# Altium PCB Line folowing robot za profesora.PcbDoc
Units mil, origin at the board's own origin, x right, y up, seen from the top; angles counter-clockwise.
Board outline 3040 x 2340 mil, 2 copper layers (Top Layer, Bottom Layer); 33 components, 29 nets, 122 pads, 41 vias.
Unrouted connection lines stored in the file: 12.
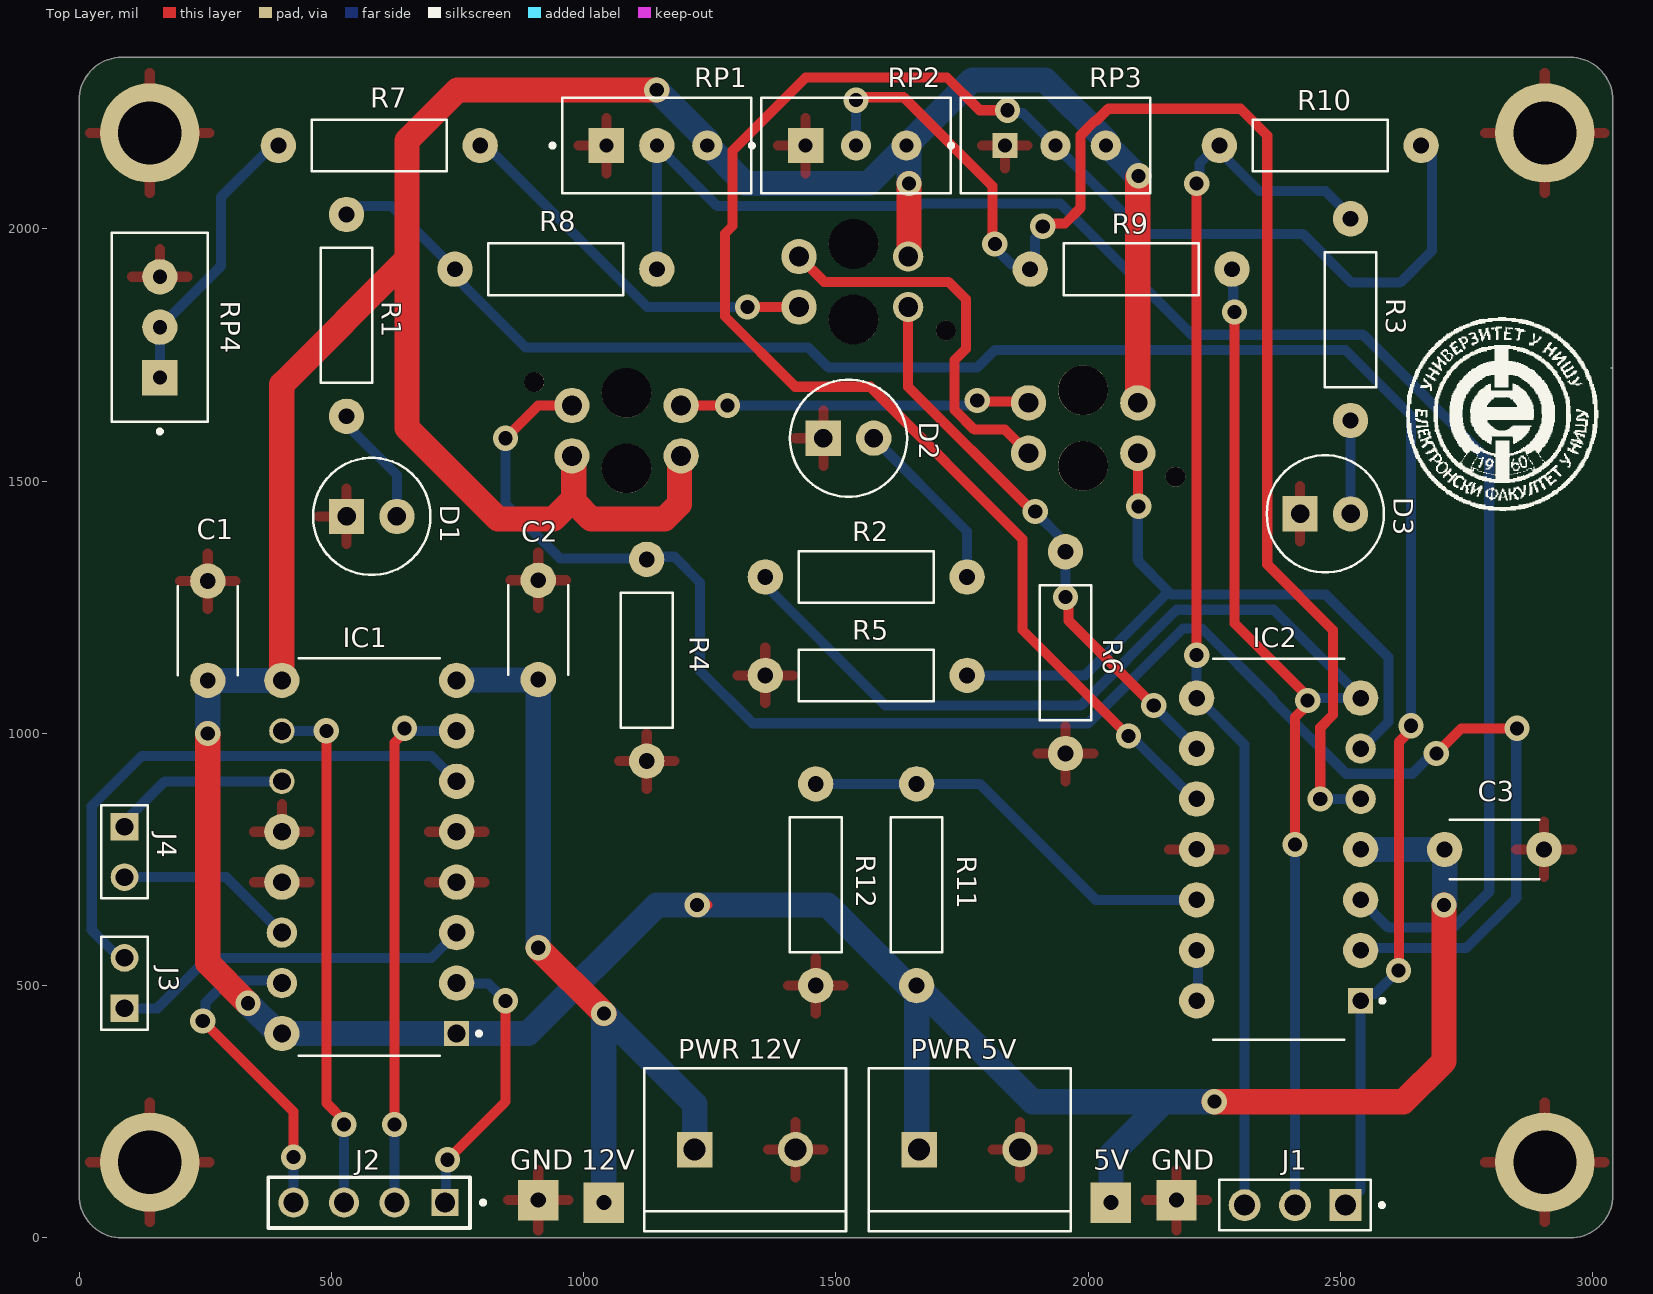
[diagram p0: Top Layer view]
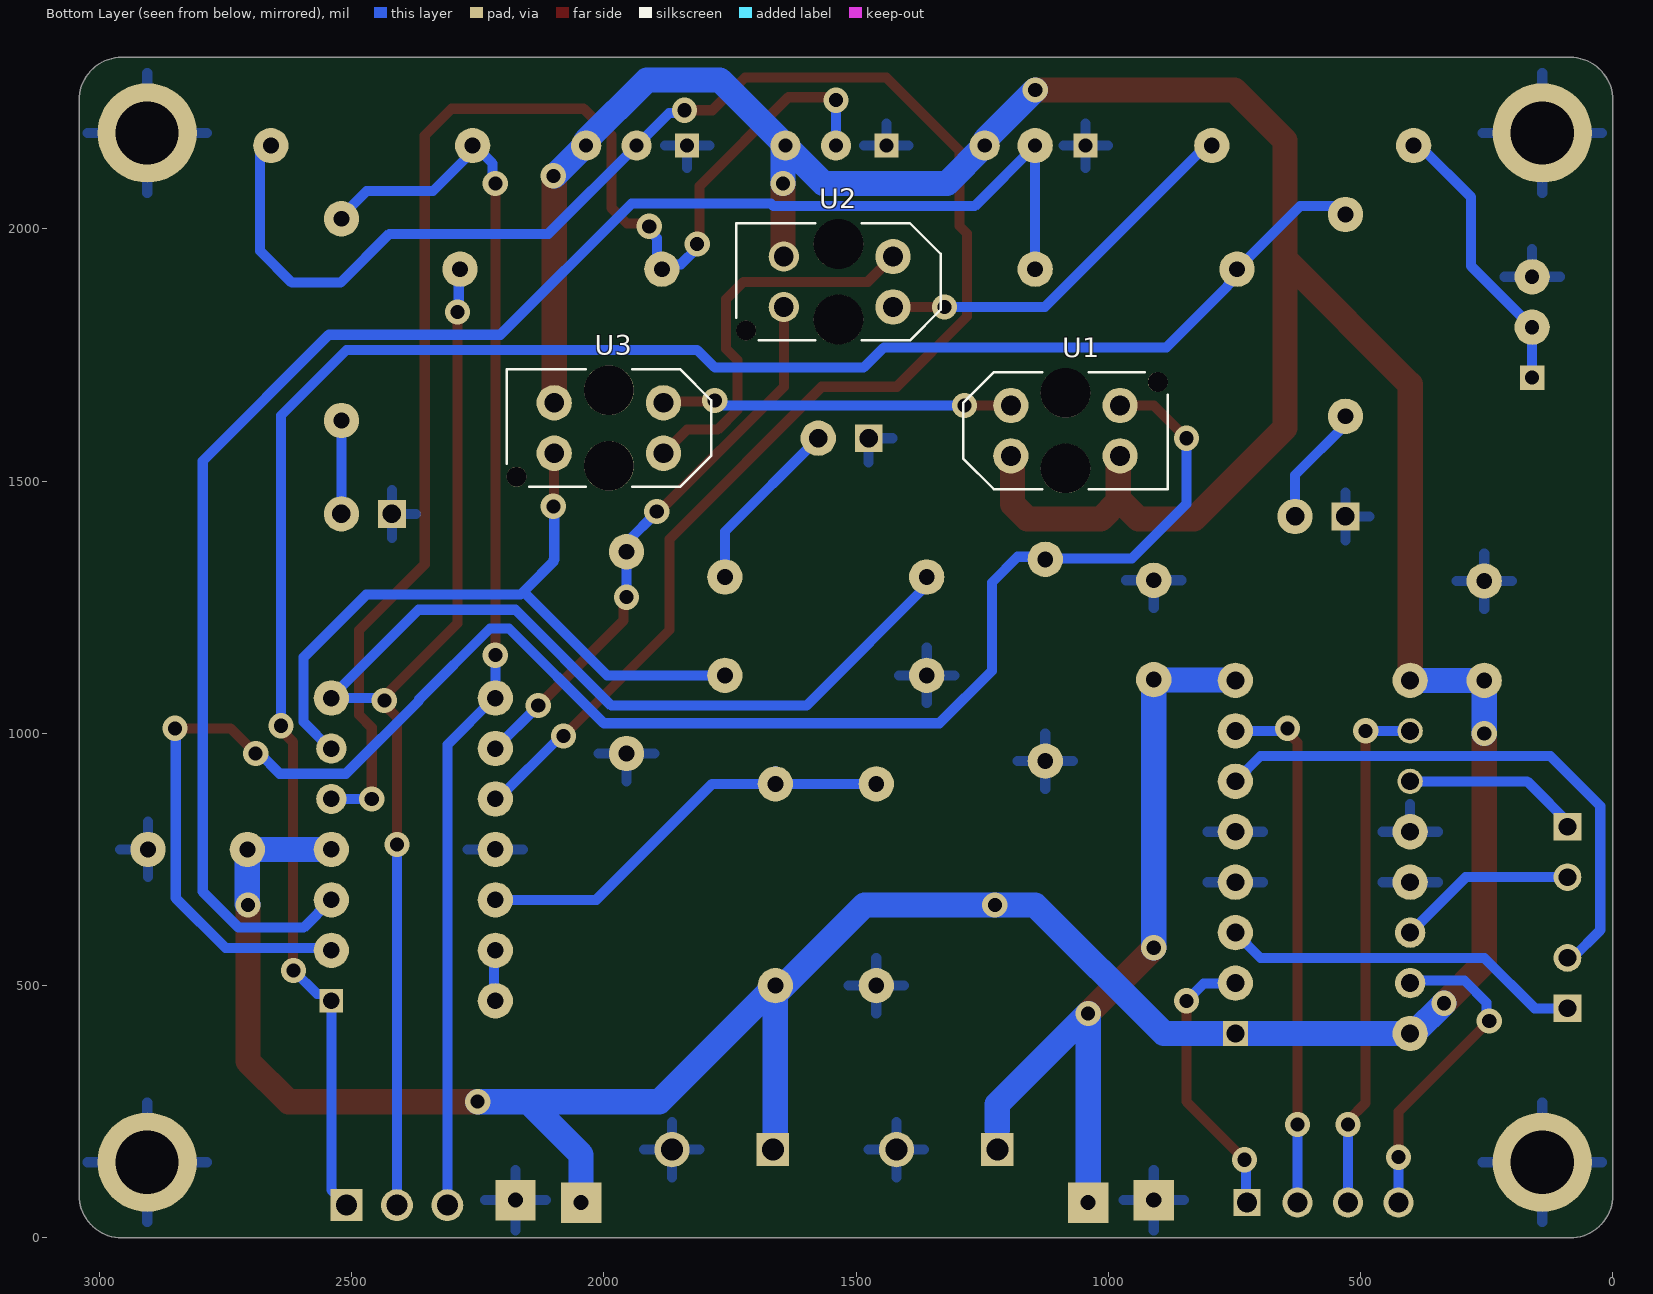
[diagram p1: Bottom Layer view, seen from below]
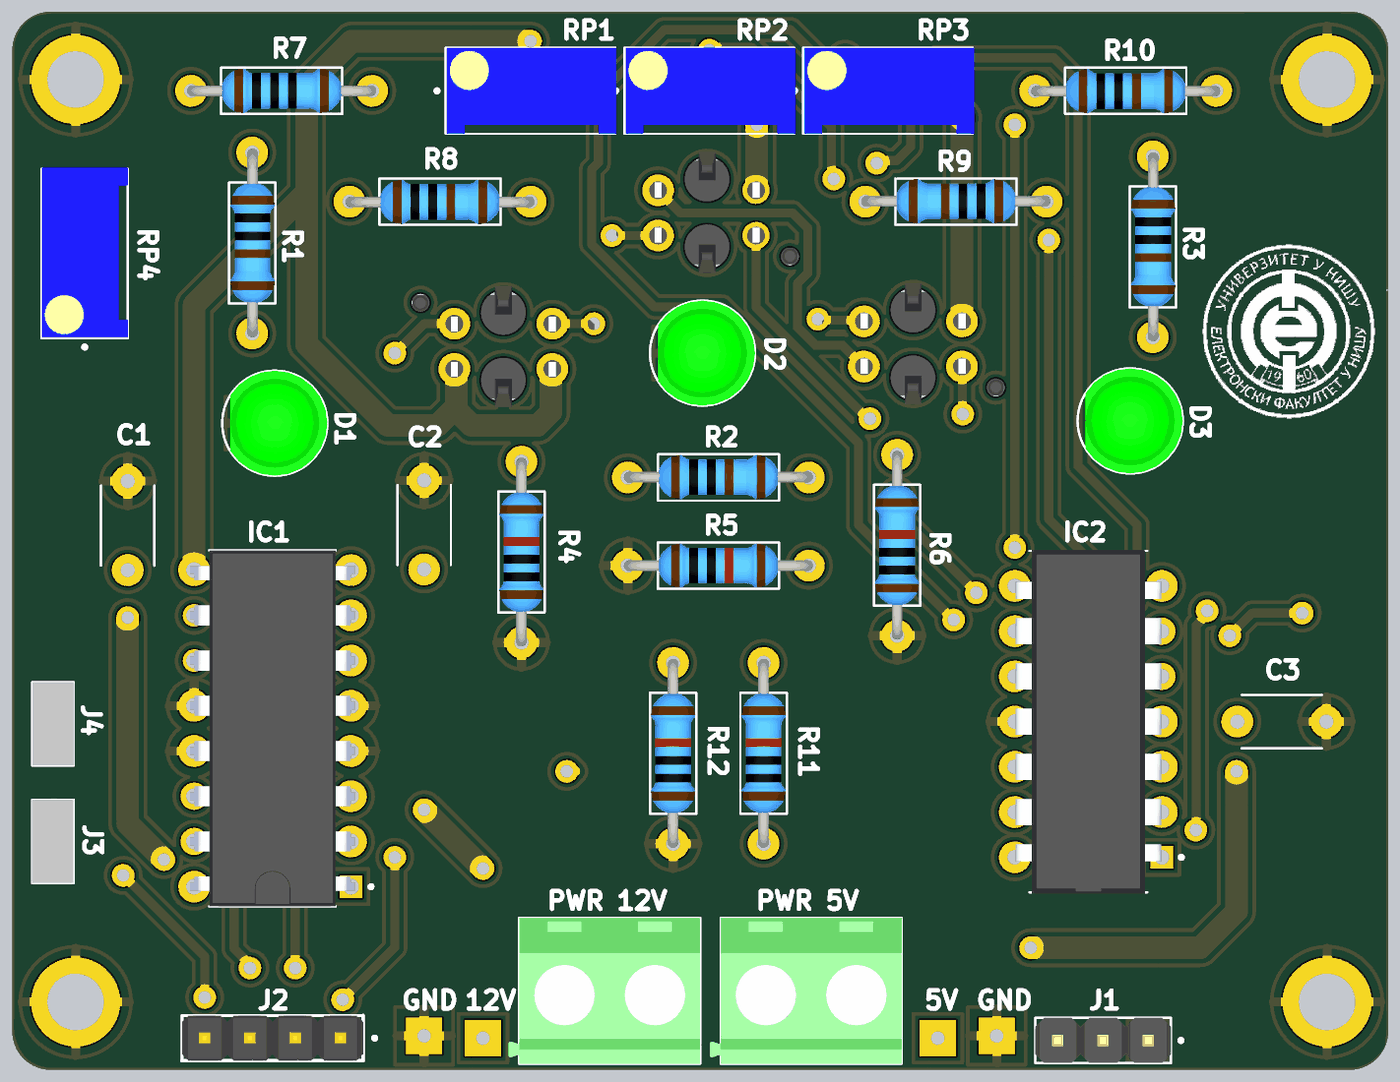
[diagram p2: 3D render of the assembled board from above, using the file's embedded part models]
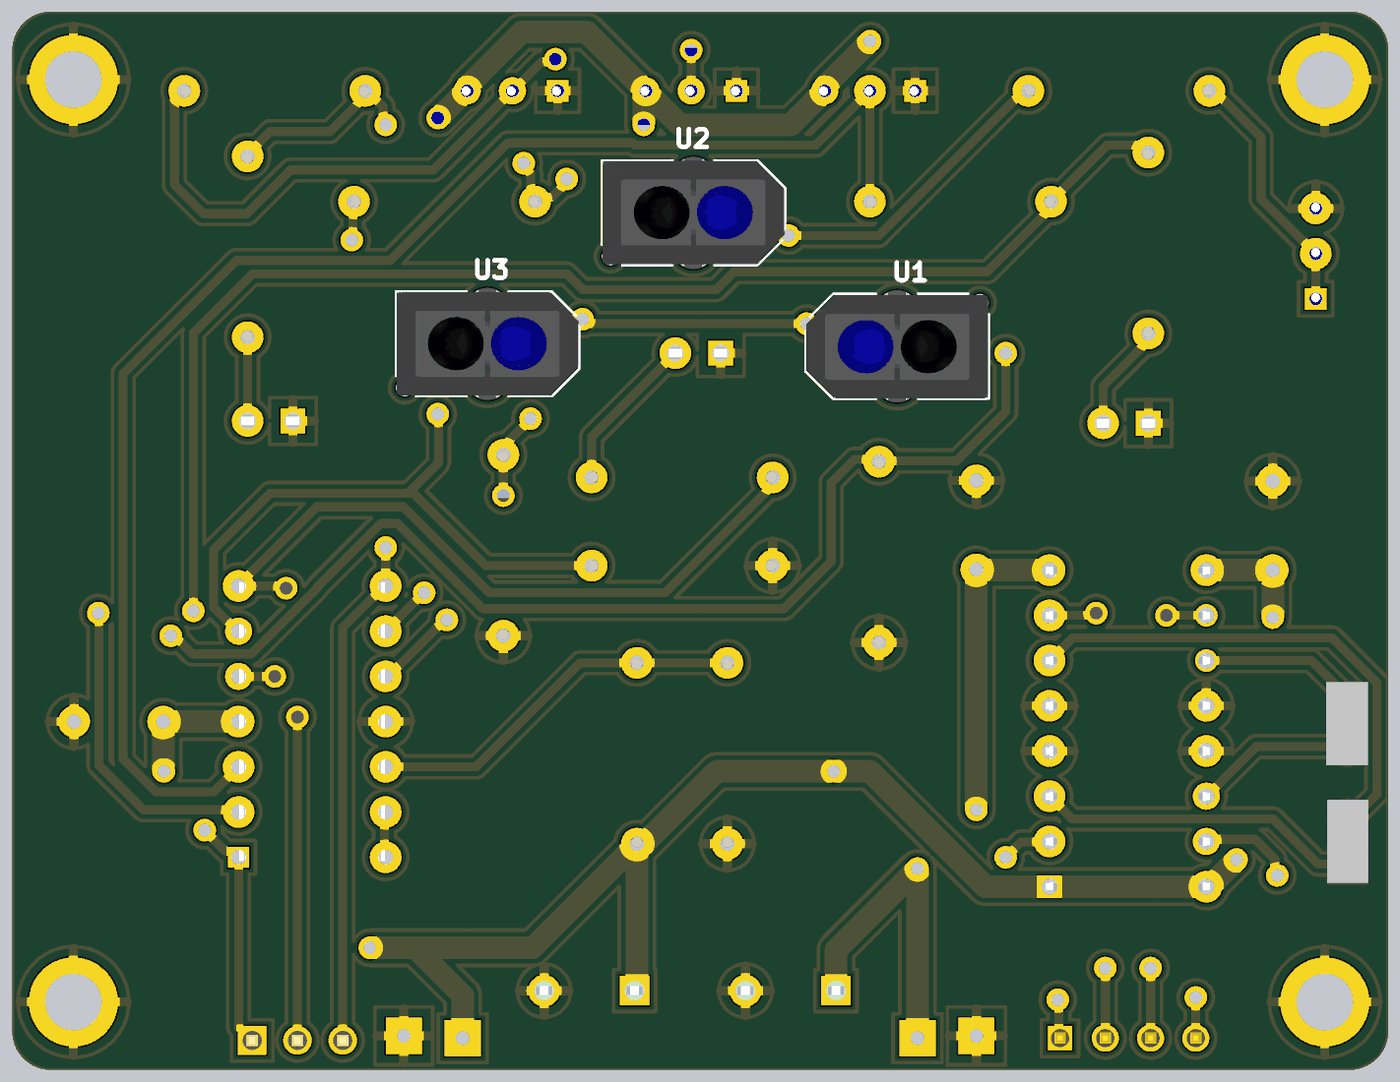
[diagram p3: 3D render of the assembled board from below, using the file's embedded part models]

## Layer stack, top to bottom
Top Solder: solder mask 0.4, Solder Resist, Dk 3.5
Top Layer: signal copper 1.4
Dielectric 1: dielectric 12.6, FR-4, Dk 4.8
Bottom Layer: signal copper 1.4
Bottom Solder: solder mask 0.4, Solder Resist, Dk 3.5

## Board outline
0,85 0,2255 cw(c85,2255) 85,2340 2955,2340 cw(c2955,2255) 3040,2255 3040,85 cw(c2955,85) 2955,0 85,0 cw(c85,85)

## Design rules (kind name [scope] priority, off if disabled: settings)
Clearance [All] p1: gap=10 ignorepadtopadclearanceinfootprint=FALSE
HoleSize [All] p1: absolutevalues=TRUE maxlimit=196.85 minlimit=1 maxpercent=80.000 minpercent=20.000
PolygonConnect [All] p1: connectstyle=Relief reliefconductorwidth=20 reliefentries=4 polygonreliefangle="90 Angle" airgapwidth=20
RoutingVias [All] p1: holewidth=28 width=50 viastyle="Through Hole" minholewidth=28 minwidth=50 maxholewidth=28 maxwidth=50
SolderMaskExpansion [All] p1: expansion=4 istentingtop=FALSE
SupplyNets "Schematic Supply Nets" [InNet('GND')] p1: voltage=0.000
Width POWER [InNetClass('POWERNET')] p1: maxlimit=50 minlimit=20 preferedwidth=20 minimp=50.000000 maximp=50.000000 favimp=50.000000
Width [All] p2: maxlimit=50 minlimit=10 preferedwidth=20 minimp=50.000000 maximp=50.000000 favimp=50.000000
29 further rules are at their usual default settings.

## Classes and differential pairs
net class POWERNET: 5VIN

## Components (designator, comment, footprint, x,y, rotation, side; value= is the part's Value field where it differs from the comment)
C1 "" CAPRB500W50L450T300H550 255,1203.43 r90 top
C2 "" CAPRB500W50L450T300H550 910,1205 r90 top
C3 "" CAPRB500W50L450T300H550 2805,770 r0 top
D1 "" LEDRD254W50D500H1060 580,1430 r0 top
D2 "" LEDRD254W50D500H1060 1525,1585 r0 top
D3 "" LEDRD254W50D500H1060 2470,1435 r0 top
IC1 "L293D" DIP880W50P254L2000H510Q16 575,755 r180 top
IC2 "" DIP825W47P254L1917H533Q14 2377.5,770 r180 top (schematic designator J)
J1 "" HARWIN_M20-9990345 2410,65 r180 top
J2 "" "4 pin header 1 2 3 4" 575,70 r0 top
J3 "" TE_5-146278-2 90,505 r90 top
J4 "" TE_5-146278-2 90,765 r270 top
"PWR 5V" "" TE_282837-2 1765,175 r0 top (schematic designator P1)
"PWR 12V" "" TE_282837-2 1320,175 r0 top (schematic designator P2)
R1 "1K" "Otpornik 1k Ohm" 530,1828.46 r270 top
R2 "1K" "Otpornik 1k Ohm" 1560,1310 r0 top
R3 "1K" "Otpornik 1k Ohm" 2520,1820 r270 top
R4 "10k" 10k 1125,1145 r90 top
R5 "10k" 10k 1560,1115 r0 top
R6 "10k" 10k 1955,1160 r90 top
R7 "100R" 100R 585,2165 r0 top
R8 "33K" RESAD1100W55L680D260 945,1920 r0 top
R9 "33K" RESAD1100W55L680D260 2085,1920 r180 top
R10 "33K" RESAD1100W55L680D260 2460,2165 r0 top
R11 "10k" 10k 1660,700 r270 top
R12 "10k" 10k 1460,700 r90 top
RP1 "50k" TRIM_3296W-1-250#1 1145,2165 r0 top
RP2 "50k" TRIM_3296W-1-250#2 1540,2165 r0 top
RP3 "50k" TRIM_3296W-1-250#3 1935,2165 r0 top
RP4 "250R" TRIM_3296W-1-250#4 160,1805 r90 top
U1 "IR sensor" "OPTO_TCRT5000 verzija2"#1 1085,1600 r0 bottom
U2 "IR sensor" "OPTO_TCRT5000 verzija2"#2 1535,1895 r180 bottom
U3 "IR sensor" "OPTO_TCRT5000 verzija2"#1 1990,1605.2 r180 bottom

## Footprints (in the part's own frame and the unit in brackets; to place one, negate y for a bottom-side part, rotate by r counter-clockwise, add the part's x,y. Pads: shape width x height; smd on the part's side, far side on the other; paste and mask are expansions set on the pad)
"4 pin header 1 2 3 4" [mil]
  rect 53.94x53.94 / inner round 53.94 / far side rect 53.94x53.94 hole 40.16: 1(150,0)
  round 60 hole 40.16: 2(50,0) 3(-50,0) 4(-150,0)
  silkscreen extent -200,-50 230,50, body extent -200,-50 200,50, height 374
10k [mil]
  round 70 hole 31.5: 1(-200,0) 2(200,0)
  silkscreen extent -134,-51 134,51, body extent -209,-49 209,49, height 138
100R [mil]
  round 70 hole 31.5: 1(-190,0) 2(210,0)
  silkscreen extent -124,-51 144,51, body extent -199,-49 219,49, height 138
CAPRB500W50L450T300H550 [mil]
  round 70 hole 31.5: 1(-98.43,0) 2(98.43,0)
  silkscreen extent -89,-59 89,59, body extent -163,-80 163,79, height 393
DIP825W47P254L1917H533Q14 [mil]
  rect 50x50 / inner round 46.46 / far side rect 46.46x46.46 hole 32.68: 1(-162.5,300)
  round 70 hole 32.68: 2(-162.5,200) 3(-162.5,100) 4(-162.5,0) 7(-162.5,-300) 8(162.5,-300) 9(162.5,-200) 10(162.5,-100) 11(162.5,0) 12(162.5,100) 13(162.5,200) 14(162.5,300)
  round 60 hole 32.68: 5(-162.5,-100) 6(-162.5,-200)
  silkscreen extent -209,-378 130,378, body extent -161,-380 161,380, height 200
DIP880W50P254L2000H510Q16 [mm]
  rect 1.27x1.27 / inner round 1.25 / far side rect 1.25x1.25 hole 0.9: 1(-4.4,8.89)
  round 1.778 hole 0.9: 2(-4.4,6.35) 3(-4.4,3.81) 4(-4.4,1.27) 5(-4.4,-1.27) 6(-4.4,-3.81) 7(-4.4,-6.35) 8(-4.4,-8.89) 9(4.4,-8.89) 12(4.4,-1.27) 13(4.4,1.27) 16(4.4,8.89)
  round 1.27 hole 0.9: 10(4.4,-6.35) 11(4.4,-3.81)
  round 1.524 hole 0.9: 14(4.4,3.81) 15(4.4,6.35)
  silkscreen extent -5.63,-10 3.55,10, body extent -4.62,-10 4.62,10, height 5.1
HARWIN_M20-9990345 [mm]
  rect 1.605x1.605 / inner round 1.605 / far side rect 1.605x1.605 hole 1.07: 1(-2.54,0)
  round 1.605 hole 1.07: 2(0,0) 3(2.54,0)
  silkscreen extent -4.47,-1.27 3.81,1.27, body extent -3.81,-1.27 3.81,1.27, height 8.64
LEDRD254W50D500H1060 [mil]
  round 70 hole 36.61: A(50,0)
  rect 70x70 / inner round 55.12 / far side rect 55.12x55.12 hole 36.61: C(-50,0)
  silkscreen extent -116,-116 116,116, body extent -98,-116 116,116, height 378
"OPTO_TCRT5000 verzija2"#1 [mm]
  round 1.778 hole 1: A(2.75,1.27) CATH(2.75,-1.27) COLL(-2.75,1.27) E(-2.75,-1.27)
  round 1 hole 1 unplated: ""(-4.65,-2.45)
  round 2.5 hole 2.5 unplated: ""(0,-1.9) ""(0,1.9)
  silkscreen extent -5.15,-2.95 5.15,2.95, body extent -5.11,-3.38 5.09,3.42, height 7.2
"OPTO_TCRT5000 verzija2"#2 [mm]
  round 1.778 hole 1: A(2.75,1.27) CATH(2.75,-1.27)
  round 1.524 hole 1: COLL(-2.75,1.27) E(-2.75,-1.27)
  round 1 hole 1 unplated: ""(-4.65,-2.45)
  round 2.5 hole 2.5 unplated: ""(0,-1.9) ""(0,1.9)
  silkscreen extent -5.15,-2.95 5.15,2.95, body extent -5.11,-3.38 5.09,3.42, height 7.2
"Otpornik 1k Ohm" [mil]
  round 70 hole 31.5: 1(-200,0) 2(200,0)
  silkscreen extent -134,-51 134,51, body extent -209,-48 209,50, height 137
RESAD1100W55L680D260 [mil]
  round 70 hole 31.5: 1(-200,0) 2(200,0)
  silkscreen extent -134,-51 134,51, body extent -209,-50 209,48, height 137
TE_5-146278-2 [mil]
  rect 55.04x55.04 hole 35.04: 1(-50,0)
  round 55 hole 35.04: 2(50,0)
  silkscreen extent -92,-46 92,46, body extent -92,-45 92,47, height 231
TE_282837-2 [mil]
  rect 70x70 / inner round 64.96 / far side rect 64.96x64.96 hole 43.31: 1(-100,0)
  round 70 hole 43.31: 2(100,0)
  silkscreen extent -200,-161 200,161, body extent -224,-161 200,161, height 394
TRIM_3296W-1-250#1 [mil]
  rect 70x70 / inner round 47.95 / far side rect 47.95x47.95 hole 27.95: 1(-100,0)
  round 70 hole 27.95: 2(0,0)
  round 60 hole 27.95: 3(100,0)
  silkscreen extent -211,-95 188,95, body extent -185,-95 190,95, height 455
TRIM_3296W-1-250#2 [mil]
  rect 70x70 / inner round 47.95 / far side rect 47.95x47.95 hole 27.95: 1(-100,0)
  round 60 hole 27.95: 2(0,0) 3(100,0)
  silkscreen extent -211,-95 188,95, body extent -185,-95 190,95, height 455
TRIM_3296W-1-250#3 [mil]
  rect 50x50 / inner round 47.95 / far side rect 47.95x47.95 hole 27.95: 1(-100,0)
  round 60 hole 27.95: 2(0,0) 3(100,0)
  silkscreen extent -211,-95 188,95, body extent -185,-95 190,95, height 455
TRIM_3296W-1-250#4 [mil]
  rect 70x70 / inner round 47.95 / far side rect 47.95x47.95 hole 27.95: 1(-100,0)
  round 70 hole 27.95: 2(0,0) 3(100,0)
  silkscreen extent -211,-95 188,95, body extent -185,-95 190,95, height 455

## Part data
C1 C2 C3: library part FG24X7R1H105KRT06, "Cap Ceramic 100nF 50V X7R 10% Radial 5mm 125Â°C Tape", Package="Radial TDK", Availability="In Stock", Check_prices=https://www.snapeda.com/parts/FG24X7R1H105KRT06/TDK/view-part/?ref=eda, MF=TDK, MP=FG24X7R1H105KRT06, Price=None, Purchase-URL=https://pricing.snapeda.com/search/part/FG24X7R1H105KRT06/?ref=eda, SnapEDA_Link=https://www.snapeda.com/parts/FG24X7R1H105KRT06/TDK/view-part/?ref=snap
D1 D2 D3: library part L-53GD, "LED 5mm Green 568nm 20mcd/10mA 60Â°", Package=CDIP-28, Availability=Unavailable, Check_prices=https://www.snapeda.com/parts/L-53GD/Kingbright/view-part/?ref=eda, MF=Kingbright, MP=L-53GD, Price=None, SnapEDA_Link=https://www.snapeda.com/parts/L-53GD/Kingbright/view-part/?ref=snap
IC1: "Bipolar Motor Driver - Parallel 16-PowerDIP", Package="DIP-16 STMicroelectronics", Availability="In Stock", Check_prices=https://www.snapeda.com/parts/L293D/STMicroelectronics/view-part/?ref=eda, MF=STMicroelectronics, MP=L293D, Price=None, Purchase-URL=https://pricing.snapeda.com/search/part/L293D/?ref=eda, SnapEDA_Link=https://www.snapeda.com/parts/L293D/STMicroelectronics/view-part/?ref=snap
IC2: library part LM324N/NOPB, "Quad, 30-V, 1.2-MHz operational amplifier", Package="PDIP-14 Texas Instruments", Check_prices=https://www.snapeda.com/parts/LM324N/Texas+Instruments/view-part/?ref=eda, MF="Texas Instruments", MP=LM324N, SnapEDA_Link=https://www.snapeda.com/parts/LM324N/Texas+Instruments/view-part/?ref=snap
J1: library part M20-9990345, "2.54mm (0.1) Pitch SIL Vertical Throughboard Pin Header, 6.1mm mating pin height, gold (hi-temp mould), 3 contacts", Package=None, Check_prices=https://www.snapeda.com/parts/M20-9990345/Harwin+Inc./view-part/?ref=eda, MF=Harwin, MP=M20-9990345, SnapEDA_Link=https://www.snapeda.com/parts/M20-9990345/Harwin+Inc./view-part/?ref=snap
J2: library part MTSW-104-08-L-S-315, Package=None, Availability=Unavailable, MP=MTSW-104-08-L-S-315, Price=None
J3 J4: library part 5-146278-2, "02 MODII HDR SRST B/A .100CL", Package=None, Availability=Warning, Centerline_Pitch="2.54 mm[.1 in]", DigiKey-Purchase-URL=https://snapeda.com/shop?store=DigiKey&id=1237793, EU_RoHS_Compliance=Compliant, MF="TE Connectivity", Mouser-Purchase-URL=https://snapeda.com/shop?store=Mouser&id=1237793, MP=5-146278-2, Number_of_Positions=2, Price=None, Product_Type=Connector, SnapEDA_Link=https://www.snapeda.com/parts/5-146278-2/TE%20Connectivity%20AMP%20Connectors/view-part/1237793/?ref=snap
"PWR 5V" "PWR 12V": library part 282837-2, "2 pin terminal", Package=None, Availability="In Stock", Check_prices=https://www.snapeda.com/parts/282837-2/TE+Connectivity+AMP+Connectors/view-part/?ref=eda, MF="TE Connectivity", MP=282837-2, Price=None, Purchase-URL=https://pricing.snapeda.com/search/part/282837-2/?ref=eda, SnapEDA_Link=https://www.snapeda.com/parts/282837-2/TE+Connectivity+AMP+Connectors/view-part/?ref=snap
R1 R2 R3 R4 R5 R6 R7 R11 R12: library part MFR-25FRF52-100R, "100 Ohms Â±1% 0.25W, 1/4W Through Hole Resistor Axial Metal Film", Package="Axial Yageo", Availability=Warning, Check_prices=https://www.snapeda.com/parts/MFR-25FRF52-100R/Yageo/view-part/3657249/?ref=eda, MF=Yageo, MP=MFR-25FRF52-100R, Price=None, Purchase-URL=https://pricing.snapeda.com/search/part/MFR-25FRF52-100R/?ref=eda, SnapEDA_Link=https://www.snapeda.com/parts/MFR-25FRF52-100R/Yageo/view-part/3657249/?ref=snap
R8 R9 R10: library part MFR-25FBF52-1K, "1.07 kOhms Â±1% 0.25W, 1/4W Through Hole Resistor Axial - Metal Film", Package="Axial Yageo", Availability="In Stock", Check_prices=https://www.snapeda.com/parts/MFR-25FBF52-1K/Yageo/view-part/?ref=eda, MF=Yageo, MP=MFR-25FBF52-1K, Price=None, Purchase-URL=https://pricing.snapeda.com/search/part/MFR-25FBF52-1K/?ref=eda, SnapEDA_Link=https://www.snapeda.com/parts/MFR-25FBF52-1K/Yageo/view-part/?ref=snap
RP1 RP2 RP3: library part 3362P-1-251LF, "50k Ohms 0.5W, 1/2W PC Pins Through Hole Trimmer Potentiometer Cermet 1.0 Turn Top Adjustment", Package="3362P-1 Bourns Inc.", Availability="In Stock", Check_prices=https://www.snapeda.com/parts/3362P-1-251LF/Bourns/view-part/?ref=eda, MF=Bourns, MP=3362P-1-251LF, Price=None, Purchase-URL=https://pricing.snapeda.com/search/part/3362P-1-251LF/?ref=eda, SnapEDA_Link=https://www.snapeda.com/parts/3362P-1-251LF/Bourns/view-part/?ref=snap
RP4: library part 3362P-1-251LF, "250 Ohms 0.5W, 1/2W PC Pins Through Hole Trimmer Potentiometer Cermet 1.0 Turn Top Adjustment", Package="3362P-1 Bourns Inc.", Availability="In Stock", Check_prices=https://www.snapeda.com/parts/3362P-1-251LF/Bourns/view-part/?ref=eda, MF=Bourns, MP=3362P-1-251LF, Price=None, Purchase-URL=https://pricing.snapeda.com/search/part/3362P-1-251LF/?ref=eda, SnapEDA_Link=https://www.snapeda.com/parts/3362P-1-251LF/Bourns/view-part/?ref=snap
U1 U2 U3: library part TCRT5000, "950 nm 60 mA Through Hole Reflective Optical Sensor with Transistor Output", Package=None, Availability=Unavailable, MP=TCRT5000, Price=None

## Free pads (board coordinates)
  rect 80x80 hole 30: 2(1040,70) 2(2175,75) 3(910,75) 3(2045,70)
  round 196.85 hole 125: ""(140,150) ""(140,2190) ""(2905,150) ""(2905,2190)

## Via types
v1: diameter 50, hole 28, Top Layer to Bottom Layer, 41 vias

## Nets (pads, with @x,y where several pads share a name; then routed paths per layer and width w, separated by ;. In a path a pad name is that pad's centre, name@x,y a point inside that pad or via, vN(x,y) a via of type N, cw(c..) or ccw(c..) an arc to the next point about the centre after c; other vN are vias at no path point)
5VIN: "PWR 5V.1" C1.1 C3.1 IC1.1 IC1.9 IC1.16 IC2.4 pad.3@2045,70 R11.2 RP1.3 RP2.3 RP3.3 U1.A U1.COLL U2.COLL U3.COLL | length 9406
  Top Layer w20: 255,545 255,550 ; IC1.9 IC1.9@405,1105 ; v1@1240,665 v1@1245,660 ; 1685,180 1685,185
  Top Layer w50: 255,545 v1(335,465) ; 255,551.77 v1(255,1000) ; IC1.9 401.77,1691.77 650,1940 ; U1.COLL@976.73,1547.55 U1.COLL 980.56,1546.17 980.56,1465 ; 980,1465 940,1425 830,1425 650,1605 650,1940 ; 980.56,1459.44 1015,1425 1160.71,1425 1190,1454.29 U1.A@1190,1540.76 ; v1(1145,2275) 750,2275 650,2175 650,1940 ; U2.COLL 1645,1946.73 v1(1645,2090) ; U3.COLL@2098.27,1660 v1@2098.27,2101.73 ; v1(2250,270) 2625,270 2705,350 v1(2705,660)
  Bottom Layer w20: C1.1@255,1106.85 C1.1@255,1108.42 ; U1.COLL@966.73,1543.27 973.46,1550 U1.COLL@973.46,1539.43 ; RP3.3 RP3.3@2037.5,2165 ; v1@2097.5,2105 v1(2100,2105) ; v1(2705,660) v1@2705.79,660.79
  Bottom Layer w50: v1(255,1000) C1.1 IC1.9 ; v1(335,465) 395,405 IC1.1 890,405 1145,660 v1(1225,660) 1483.46,660 R11.2@1660,483.46 ; v1(1145,2275) 1243.09,2176.91 1243.09,2166.91 1320,2090 1565,2090 RP2.3 ; v1(1645,2090) 1645,2160 RP2.3 ; 1660,200 1660,490.76 1662.71,493.47 1666.53,493.47 1890,270 2140,270 ; RP3.3 2035,2174.85 1914.85,2295 1770,2295 RP2.3 ; RP3.3@2037.5,2165 v1@2097.5,2105 ; pad.3@2045,70 2045,165 2140,260 2140,270 ; v1(2250,270) 2140,270 ; IC2.4 C3.1@2691.57,770 ; v1@2705.79,660.79 2706.57,661.57 C3.1
12V: "PWR 12V.1" C2.1 IC1.8 pad.2@1040,70 | length 1583.8
  Top Layer w20: IC1.8 IC1.8@749.02,1105.79 ; C2.1@909.21,1105.79 C2.1@910,1105 ; 1201.31,193.69 1220,175
  Top Layer w50: v1(910,575) v1(1040,445)
  Bottom Layer w50: IC1.8@749.02,1105.79 C2.1@909.21,1105.79 ; v1(910,575) C2.1 ; pad.2@1040,70 v1(1040,445) 1220,265 1220,215
GND: "PWR 5V.2" "PWR 12V.2" C1.2 C2.2 C3.2 D1.C D2.C D3.C IC1.4 IC1.5 IC1.12 IC1.13 IC2.11 pad. pad.2@2175,75 pad.3@910,75 R4.1 R5.1 R6.1 R12.1 RP1.1 RP2.1 RP3.1 RP4.3
NetD1_A: D1.A R1.2 | length 218.3
  Bottom Layer w20: R1.2@530,1611.93 630,1511.93 D1.A@630,1435
NetD2_A: D2.A R2.2 | length 351.6
  Bottom Layer w20: D2.A 1760,1400 R2.2
NetD3_A: D3.A R3.2 | length 173.5
  Bottom Layer w20: D3.A R3.2@2520,1608.46
NetIC1_2: IC1.2 J2.1 | length 578.9
  Top Layer w20: v1(730,155) 845.07,270.07 v1(845.07,469.93) ; IC1.2 IC1.2@753.82,499.41
  Bottom Layer w20: J2.1 727.5,72.5 727.5,152.5 v1(730,155) ; IC1.2@753.82,499.41 758.45,504.05 810.95,504.05 v1@855,460
NetIC1_3: IC1.3 J3.1 | length 730.4
  Bottom Layer w20: J3.1@80,455 155,455 255,555 698.23,555 IC1.3
NetIC1_6: IC1.6 J3.2 | length 1108.7
  Bottom Layer w20: J3.2@80,555 25,610 25,856 124,955 698.23,955 IC1.6
NetIC1_7: IC1.7 J2.2 | length 1051.5
  Top Layer w20: v1(625,225) 625,981.88 645,1001.88 v1(645,1010)
  Bottom Layer w20: J2.2@625,65 v1(625,225) ; v1@650,1005 IC1.7
NetIC1_10: IC1.10 J2.3 | length 1042.7
  Top Layer w20: v1(490,1005) 490,267.78 525,232.78 v1(525,225)
  Bottom Layer w20: IC1.10 v1(490,1005) ; J2.3@525,65 v1(525,225)
NetIC1_11: IC1.11 J4.1 | length 359.1
  Bottom Layer w20: J4.1@80,815 170,905 IC1.11
NetIC1_14: IC1.14 J4.2 | length 367.3
  Bottom Layer w20: J4.2@80,715 291.77,715 IC1.14
NetIC1_15: IC1.15 J2.4 | length 649.7
  Top Layer w20: v1(245,430) 425,250 v1(425,160)
  Bottom Layer w20: v1(245,430) 250.74,435.74 250.74,466.7 294.04,510 396.77,510 IC1.15 ; J2.4@425,65 v1(425,160)
NetJ1_1: IC2.1 J1.1 R1.1 R8.1 | length 3947.3
  Top Layer w20: v1(2615,530) 2615.73,530.73 2615.73,982.61 2640,1006.88 v1(2640,1015)
  Bottom Layer w20: R1.1@530,2045 620,2045 R8.1 745,1906.47 763.46,1888.01 763.46,1886.54 885,1765 1445,1765 1485,1725 1780,1725 1815,1760 2510,1760 2640,1630 v1(2640,1015) ; J1.1 2540,95 IC2.1 2553.23,483.23 2568.23,483.23 v1(2615,530)
NetJ1_2: IC2.7 J1.2 R2.1 R9.1 | length 3476.1
  Top Layer w20: R9.1@2288.07,1910 R9.1@2289.8,1908.27 ; v1(2290,1835) 2290,1218.12 2435,1073.12 v1(2435,1065) 2435,1056.88 2410,1031.88 v1(2410,780)
  Bottom Layer w20: R2.1@1343.47,1310 1598.47,1055 1985,1055 2175,1245 2367.5,1245 IC2.7@2541.25,1071.25 ; R9.1@2285,1910 2287.5,1907.5 2287.5,1837.5 v1(2290,1835) ; J1.2@2410,70 v1(2410,780) ; v1(2435,1065) 2440,1070 IC2.7
NetJ1_3: IC2.8 J1.3 R3.1 R10.1 | length 2480.3
  Top Layer w20: v1(2215,1155) v1(2215,2090) ; R10.1@2250,2165 2253.46,2165 R10.1@2255,2165
  Bottom Layer w20: IC2.8@2215,1075 v1(2215,1155) ; v1(2215,2090) 2220.74,2095.74 2220.74,2129.9 2245,2154.16 R10.1@2245,2165 ; IC2.8@2217.5,1070 2310,977.5 J1.3 ; R10.1@2248.46,2165 2338.46,2075 2470,2075 R3.1@2520,2025
NetJ_2: IC2.2 R4.2 U1.E | length 3502.1
  Top Layer w20: v1(845,1585) 910,1650 U1.E ; v1(2690,960) 2740,1010 v1(2850,1010)
  Bottom Layer w20: v1(845,1585) 845,1455 953.47,1346.53 R4.2@1125,1346.53 ; R4.2@1125,1350 1180,1350 1230.82,1299.18 1230.82,1124.18 1335,1020 2000,1020 2188,1208 2225.64,1208 2366,1067.64 2366,1065.36 2511.36,920 2642.22,920 2682.22,960 v1(2690,960) ; IC2.2 2545,575 2750,575 2848.42,673.42 2848.42,1008.42 v1(2850,1010)
NetJ_3: IC2.3 R8.2 RP1.2 | length 3319
  Bottom Layer w20: R8.2 RP1.2 1265,2045 1663.64,2045 1668.64,2050 1945,2050 2205,1790 2545,1790 2795,1540 2795,686.36 2723.64,615 2595,615 IC2.3
NetJ_5: IC2.5 R9.2 RP2.2 | length 2834.3
  Top Layer w20: v1(1540,2255) 1545.74,2260.74 1634.26,2260.74 1810,2085 1810,1975 v1(1815,1970) ; v1(1910,2005) 1915.74,2010.74 1954.2,2010.74 1985,2041.54 1985,2185.71 2014.29,2215 2017,2215 2040,2238 2302,2238 2355,2185 2355,1335 2485,1205 2485,1036.36 2460,1011.36 v1(2460,870)
  Bottom Layer w20: RP2.2 v1(1540,2255) ; v1(1815,1970) 1815,1961.88 1847.32,1929.57 1881.04,1929.57 1894.57,1943.1 1894.57,1981.45 1910,1996.88 v1(1910,2005) ; v1(2460,870) IC2.5
NetJ_6: IC2.6 R5.2 U3.E | length 1446.4
  Top Layer w20: v1(2100,1450) 2099.13,1450.87 2099.13,1554.13 U3.E@2100,1555
  Bottom Layer w20: R5.2@1776.54,1115 1993.69,1115 2159.35,1280.65 ; 2098.27,1345 v1@2098.27,1453.27 ; 2100,1345 2100,1340 2150,1290 2159.35,1280.65 ; IC2.6@2542.5,970 2595,1022.5 2595,1151 2471,1275 2165,1275 2159.35,1280.65
NetJ_9: IC2.9 R6.2 U2.E | length 1115.3
  Top Layer w20: U2.E 1643.27,1686.64 1889.91,1440 v1(1895,1440) ; v1(1955,1270) 1960.74,1264.26 1960.74,1224.26 v1(2130,1055)
  Bottom Layer w20: v1(1895,1440) 1895,1438.27 R6.2@1954.13,1379.13 ; v1(1955,1270) R6.2@1955,1380 ; v1(2130,1055) IC2.9
NetJ_10: IC2.10 R10.2 RP3.2 | length 3617.7
  Top Layer w20: v1(1840,2235) 1785,2235 1720,2300 1440,2300 1295,2155 1295,2005.68 1280,1990.68 1280,1826.36 1419.36,1687 1568,1687 1870,1385 1870,1205 v1(2080,995)
  Bottom Layer w20: v1(1840,2235) 1845.74,2229.26 1870.74,2229.26 RP3.2 2110,1990 2425,1990 2521.72,1893.28 2618.28,1893.28 2681.54,1956.54 2681.54,2021.54 ; v1(2080,995) 2085,995 2210,870 IC2.10 ; 2681.54,2025 R10.2@2681.54,2165
NetJ_12: IC2.12 R11.1 R12.2 | length 829.2
  Bottom Layer w20: R12.2@1455,900 R12.2 R11.1@1630,900 ; R11.1 1785,900 2015,670 IC2.12 ; R11.1@1660,925 R11.1@1662.79,922.21
NetJ_13: IC2.13 IC2.14 | length 100
  Bottom Layer w20: IC2.14@2217.5,470 IC2.13@2217.5,570
NetR7_1: R7.1 RP4.1 RP4.2 | length 545.5
  Bottom Layer w20: RP4.1 RP4.2 281,1926 281,2062.54 R7.1@378.46,2160
NetR7_2: R7.2 U2.CATH | length 743.6
  Top Layer w20: v1(1325,1845) U2.CATH@1425,1845
  Bottom Layer w20: R7.2@811.54,2160 1125.77,1845.77 ; 1125.77,1845 v1(1325,1845)
NetU1_CATH: U1.CATH U3.A | length 694.7
  Top Layer w20: U1.CATH v1(1285,1650) ; v1(1780,1660) 1782.4,1657.6 1879.13,1657.6 U3.A@1881.63,1655.1
  Bottom Layer w20: v1(1285,1650) 1761.88,1650 1771.88,1660 v1(1780,1660) ; U3.A@1881.63,1655.1 U3.A
NetU2_A: U2.A U3.CATH | length 777
  Top Layer w20: U2.A 1476.73,1895 1723.28,1895 1757.76,1860.53 1757.76,1762.32 1735,1739.57 1735,1641.36 1774.35,1602.01 1834.91,1602.01 U3.CATH
pads on no net: U1. U2. U3.

## Polygon pours and split planes (outlines as drawn)
GND on Top Layer "GND_L01_P001" (none, pour order 1): 0,135.39 ccw(c317.64,125.72) 0,116.04 ccw(c284.23,99.93) 0.02,83.43 ccw(c115.18,99.81) 30.09,20.5 ccw(c88.91,95.7) 83.03,0.41 2966.97,0.39 ccw(c2950.25,87.81) 2981.71,4.55 ccw(c2954.21,91.92) 3036.49,51.67 ccw(c2662.35,108.61) 3040,133.17 3040,2265.39 ccw(c2934.62,2241.09) 2977.83,2340.23 ccw(c2830,-4595.82) 2690,2340.39 109.41,2340.39 ccw(c100.19,2155.16) 56.81,2335.48 ccw(c57.5,2327.88) 56.38,2335.43 ccw(c80,2260.83) 7.66,2290.66 ccw(c80.52,2254.77) 0,2265.39 cw(c-319.89,2250.4) 0,2235.39
GND on Bottom Layer "GND_L02_P003" (none, pour order 3): 0,135 ccw(c291.31,199.99) 0.55,132.56 -0.03,87.73 ccw(c94.18,86.5) 3.89,59.59 ccw(c235.62,148.1) 10,45 ccw(c59.55,66.14) 24.9,24.9 ccw(c91.42,97.59) 77.78,0 2965,0 2980.35,3.87 ccw(c2950.92,88.36) 3040,80 3040,2265 ccw(c2947.97,2247.1) 2975.82,2336.63 ccw(c2954.31,2269.77) 2955,2340 115,2340 ccw(c97.5,2133.53) 80,2340 ccw(c87.34,2249.92) 29.03,2318.97 ccw(c70.44,2264.49) 3.89,2280.41 ccw(c48.7,2260.91) 0,2265 cw(c-611.11,2250.01) 0,2235

## Silkscreen, mask and mechanical layers (free items; w line width, h text height)
Top Overlay:
  drawing of 39 lines, arcs and shapes, not listed
  text "GND" at 855,135 h40
  text "12V" at 995,135 h40
  text "5V" at 2010,135 h40
  text "GND" at 2125,135 h40